# Altium PCB main.PcbDoc
Units mil, origin at the board's own origin, x right, y up, seen from the top; angles counter-clockwise.
Board outline 6000 x 4000 mil, 2 copper layers (Top Layer, Bottom Layer); 10 components, 13 nets, 109 pads, 11 vias.
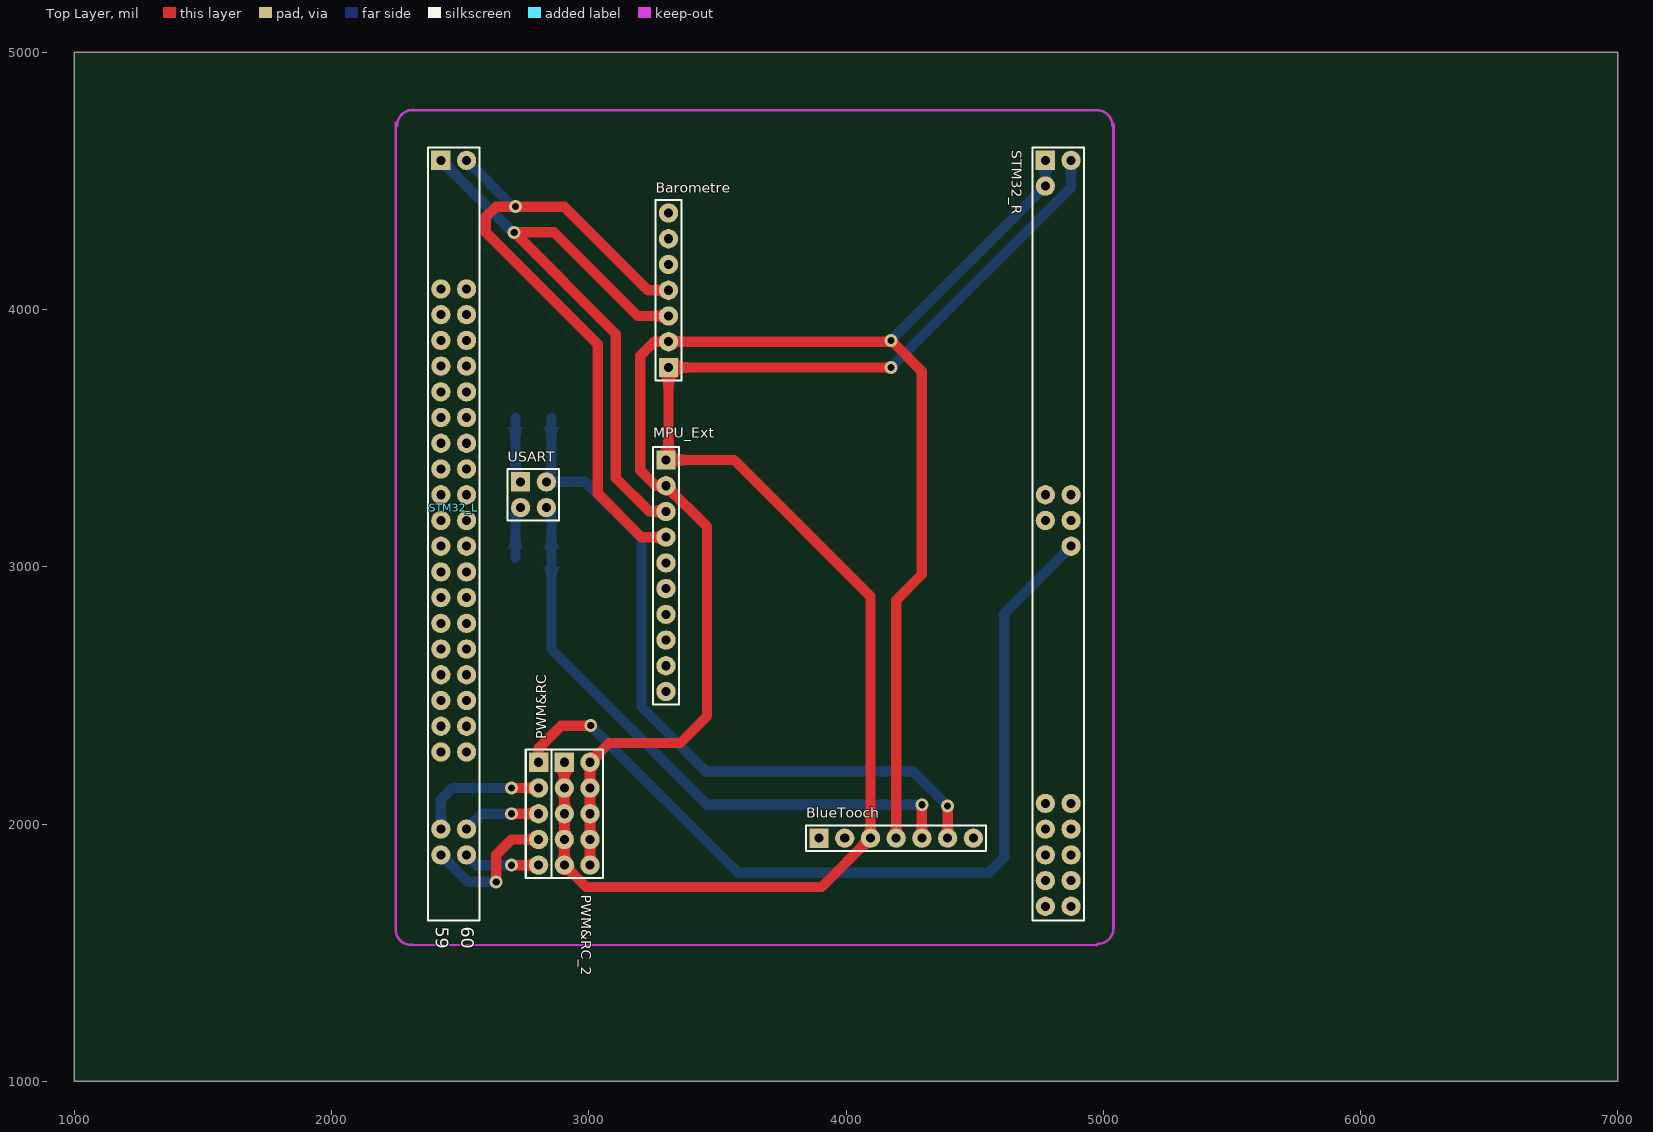
[diagram p0: Top Layer view]
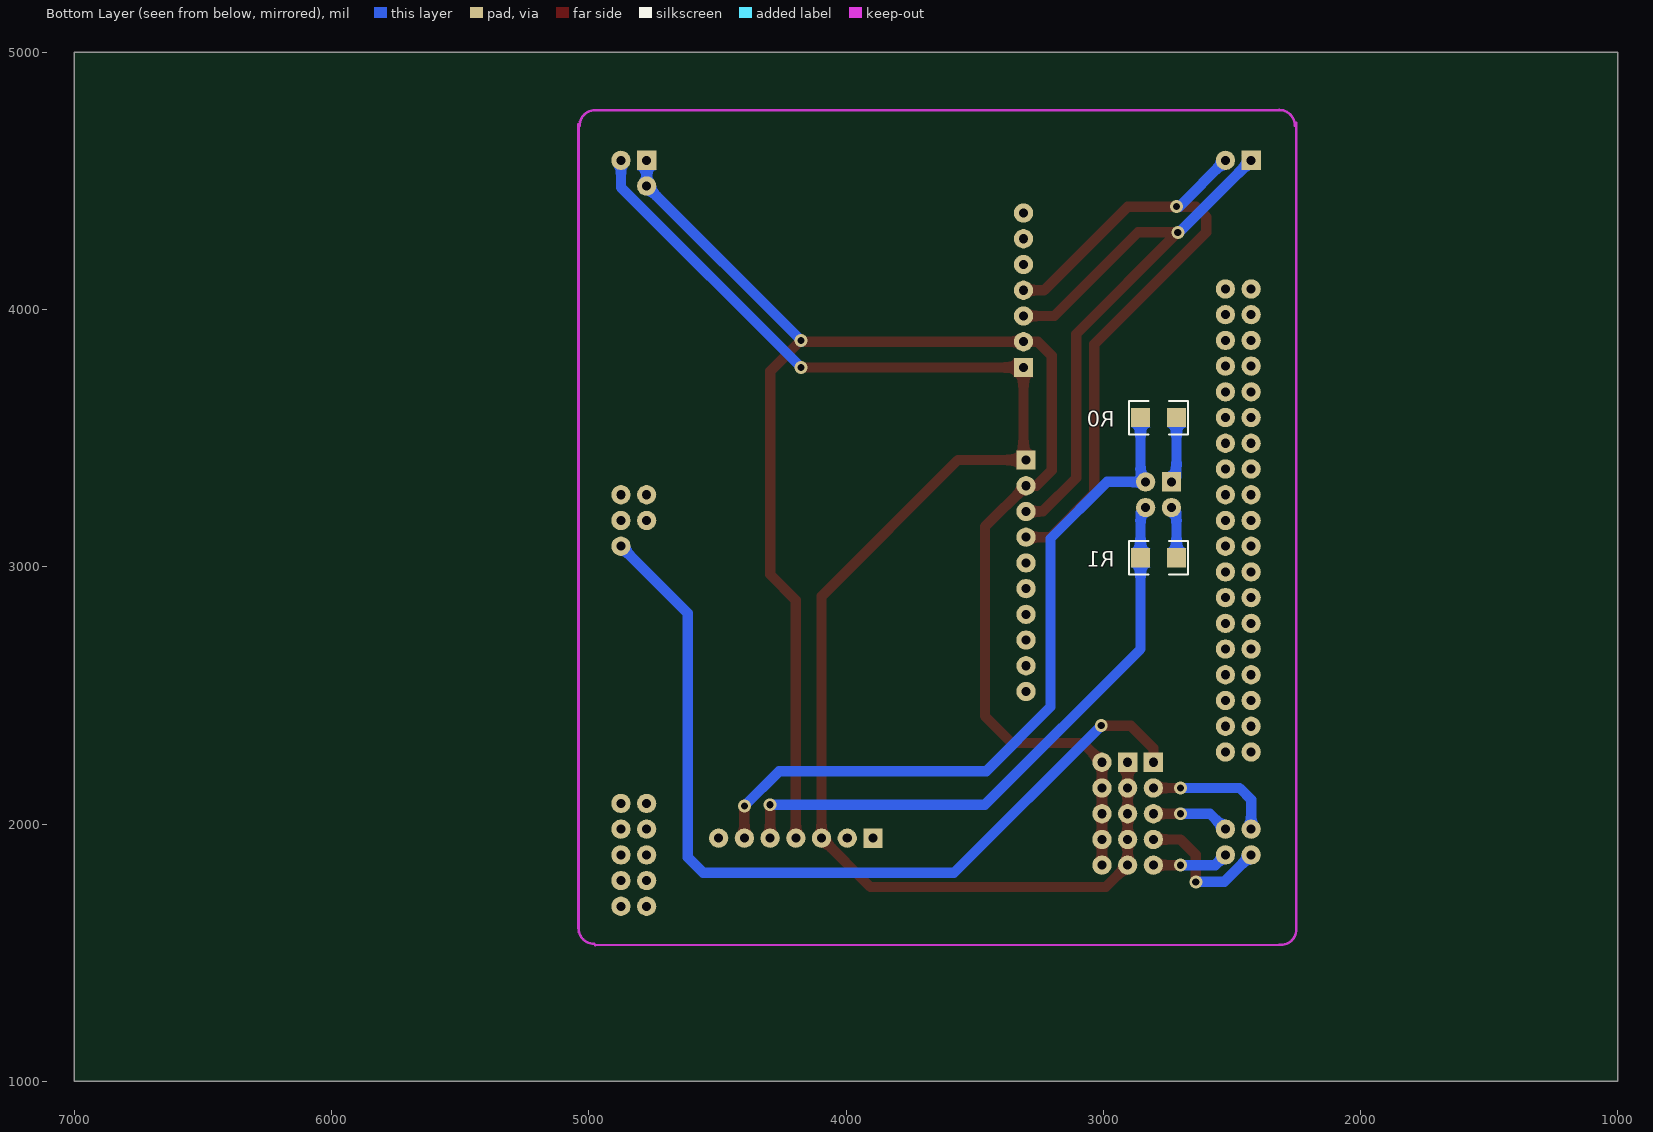
[diagram p1: Bottom Layer view, seen from below]

## Layer stack, top to bottom
Top Solder: solder mask 0.4, Solder Resist, Dk 3.5
Top Layer: signal copper 1.4
Dielectric 1: dielectric 12.6, FR-4, Dk 4.8
Bottom Layer: signal copper 1.4
Bottom Solder: solder mask 0.4, Solder Resist, Dk 3.5

## Board outline
1000,1000 7000,1000 7000,5000 1000,5000

## Design rules (kind name [scope] priority, off if disabled: settings)
Clearance [All] p1: gap=10 ignorepadtopadclearanceinfootprint=FALSE except(0: Arc-Hole Track-Hole SMDPad-Hole THPad-Hole Via-Hole Fill-Hole Poly-Hole Region-Hole Text-Hole)
PolygonConnect [All] p1: connectstyle=Relief reliefconductorwidth=10 reliefentries=4 polygonreliefangle="90 Angle" airgapwidth=10
RoutingVias [All] p1: holewidth=28 width=50 viastyle="Through Hole" minholewidth=28 minwidth=50 maxholewidth=28 maxwidth=50
SolderMaskExpansion [All] p1: expansion=4
Width [All] p1: maxlimit=50 minlimit=38 preferedwidth=40
30 further rules are at their usual default settings.

## Classes and differential pairs
component class main: Barometre BlueTooch MPU_Ext PWM&RC PWM&RC_2 R0 R1 STM32_R USART

## Components (designator, comment, footprint, x,y, rotation, side; value= is the part's Value field where it differs from the comment)
Barometre "Header 7" HDR1X7 3310,3775 r90 top
BlueTooch "Header 7" HDR1X7 3895,1945 r0 top
MPU_Ext "Header 10" HDR1X10 3300,3415 r270 top
PWM&RC "Header 5" HDR1X5 2805,2240 r270 top
PWM&RC_2 "Header 5X2" HDR2X5 2905,2240 r270 top
R0 "Res2" 1210 2785,3580 r0 bottom value=0R
R1 "Res2" 1210 2785,3035 r0 bottom value=0R
STM32_L "Header 30X2" HDR2X30#1 2425,4580 r270 top
STM32_R "Header 30X2" HDR2X30#2 4775,4580 r270 top
USART "Header 2X2" HDR2X2 2735,3330 r270 top

## Footprints (in the part's own frame and the unit in brackets; to place one, negate y for a bottom-side part, rotate by r counter-clockwise, add the part's x,y. Pads: shape width x height; smd on the part's side, far side on the other; paste and mask are expansions set on the pad)
1210 [mil] "贴片元件"
  rect 75x75 smd: 1(-70,0) 2(70,0)
  silkscreen extent -115,-65 115,65, body extent -65,-50 65,50, height 39
HDR1X5 [mm] "Connector; Header; 5 Position"
  rect 1.905x1.905 hole 0.9: 1(0,0)
  round 1.905 hole 0.9: 2(2.54,0) 3(5.08,0) 4(7.62,0) 5(10.16,0)
  silkscreen extent -1.27,-1.27 11.43,1.27
HDR1X7 [mm] "Connector; Header; 7 Position"
  rect 1.905x1.905 hole 0.9: 1(0,0)
  round 1.905 hole 0.9: 2(2.54,0) 3(5.08,0) 4(7.62,0) 5(10.16,0) 6(12.7,0) 7(15.24,0)
  silkscreen extent -1.27,-1.27 16.51,1.27
HDR1X10 [mm] "Connector; Header; 10 Position"
  rect 1.905x1.905 hole 0.9: 1(0,0)
  round 1.905 hole 0.9: 2(2.54,0) 3(5.08,0) 4(7.62,0) 5(10.16,0) 6(12.7,0) 7(15.24,0) 8(17.78,0) 9(20.32,0) 10(22.86,0)
  silkscreen extent -1.27,-1.27 24.13,1.27
HDR2X2 [mm] "Connector; Header; 2x2 Position"
  rect 1.905x1.905 hole 0.9: 1(0,0)
  round 1.905 hole 0.9: 2(0,2.54) 3(2.54,0) 4(2.54,2.54)
  silkscreen extent -1.27,-1.27 3.81,3.81
HDR2X5 [mm] "Connector; Header; 5x2 Position"
  rect 1.905x1.905 hole 0.9: 1(0,0)
  round 1.905 hole 0.9: 2(0,2.54) 3(2.54,0) 4(2.54,2.54) 5(5.08,0) 6(5.08,2.54) 7(7.62,0) 8(7.62,2.54) 9(10.16,0) 10(10.16,2.54)
  silkscreen extent -1.27,-1.27 11.43,3.81
HDR2X30#1 [mm] "Connector; Header; 30x2 Position"
  rect 1.905x1.905 hole 0.9: 1(0,0)
  round 1.905 hole 0.9: 2(0,2.54) 11(12.7,0) 12(12.7,2.54) 13(15.24,0) 14(15.24,2.54) 15(17.78,0) 16(17.78,2.54) 17(20.32,0) 18(20.32,2.54) 19(22.86,0) 20(22.86,2.54) 21(25.4,0) 22(25.4,2.54) 23(27.94,0) 24(27.94,2.54) 25(30.48,0) 26(30.48,2.54) 27(33.02,0) 28(33.02,2.54) 29(35.56,0) 30(35.56,2.54) 31(38.1,0) 32(38.1,2.54) 33(40.64,0) 34(40.64,2.54) 35(43.18,0) 36(43.18,2.54) 37(45.72,0) 38(45.72,2.54) 39(48.26,0) 40(48.26,2.54) 41(50.8,0) 42(50.8,2.54) 43(53.34,0) 44(53.34,2.54) 45(55.88,0) 46(55.88,2.54) 47(58.42,0) 48(58.42,2.54) 53(66.04,0) 54(66.04,2.54) 55(68.58,0) 56(68.58,2.54)
  silkscreen extent -1.27,-1.27 75.06,3.81
HDR2X30#2 [mm] "Connector; Header; 30x2 Position"
  rect 1.905x1.905 hole 0.9: 1(0,0)
  round 1.905 hole 0.9: 2(0,2.54) 3(2.54,0) 27(33.02,0) 28(33.02,2.54) 29(35.56,0) 30(35.56,2.54) 32(38.1,2.54) 51(63.5,0) 52(63.5,2.54) 53(66.04,0) 54(66.04,2.54) 55(68.58,0) 56(68.58,2.54) 57(71.12,0) 58(71.12,2.54) 59(73.66,0) 60(73.66,2.54)
  silkscreen extent -1.27,-1.27 75.06,3.81

## Part data
Barometre BlueTooch: "Header, 7-Pin", LatestRevisionDate=17-Jul-2002, LatestRevisionNote="Re-released for DXP Platform.", Publisher="Altium Limited"
MPU_Ext: "Header, 10-Pin", LatestRevisionDate=17-Jul-2002, LatestRevisionNote="Re-released for DXP Platform.", Publisher="Altium Limited"
PWM&RC: "Header, 5-Pin", LatestRevisionDate=17-Jul-2002, LatestRevisionNote="Re-released for DXP Platform.", Publisher="Altium Limited"
PWM&RC_2: "Header, 5-Pin, Dual row", LatestRevisionDate=17-Jul-2002, LatestRevisionNote="Re-released for DXP Platform.", Publisher="Altium Limited"
R0 R1: "Resistor", LatestRevisionDate=17-Jul-2002, LatestRevisionNote="Re-released for DXP Platform.", PackageDescription="Axial Device, Thru-Hole; 2 Leads; 0.4 in Pin Spacing", PackageReference=AXIAL-0.4, Published=8-Jun-2000, Publisher="Altium Limited"
STM32_L STM32_R: "Header, 30-Pin, Dual row", LatestRevisionDate=17-Jul-2002, LatestRevisionNote="Re-released for DXP Platform.", Publisher="Altium Limited"
USART: "Header, 2-Pin, Dual row", LatestRevisionDate=17-Jul-2002, LatestRevisionNote="Re-released for DXP Platform.", Publisher="Altium Limited"

## Via types
v1: diameter 50, hole 28, Top Layer to Bottom Layer, 11 vias

## Nets (pads, with @x,y where several pads share a name; then routed paths per layer and width w, separated by ;. In a path a pad name is that pad's centre, name@x,y a point inside that pad or via, vN(x,y) a via of type N, cw(c..) or ccw(c..) an arc to the next point about the centre after c; other vN are vias at no path point)
A6_PPM_IN: PWM&RC.1 STM32_R.32 | length 3480.9
  Top Layer w40: PWM&RC.1 2805,2295 2892.5,2382.5 v1(3007.5,2382.5)
  Bottom Layer w40: v1(3007.5,2382.5) 3580,1810 4555,1810 4615,1870 4615,2820 STM32_R.32
A9_TX: BlueTooch.6 R0.2 USART.2 | length 2853.9
  Top Layer w40: BlueTooch.6 v1@4395,2075
  Bottom Layer w40: R0.2 2855,3350 USART.2 2985,3330 3205,3110 3205,2455 3455,2205 4260,2205 v1(4395,2070)
A10_RX: BlueTooch.5 R1.2 USART.4 | length 2378.9
  Top Layer w40: BlueTooch.5 v1(4295,2075)
  Bottom Layer w40: USART.4 2855,3210 R1.2 2855,2680 3460,2075 v1(4295,2075)
B6_MOTOR1: PWM&RC.2 STM32_L.53 | length 513.6
  Top Layer w40: v1(2700,2140) PWM&RC.2
  Bottom Layer w40: STM32_L.53 2425,2095 2470,2140 v1(2700,2140)
B7_MOTOR2: PWM&RC.3 STM32_L.54 | length 304.9
  Top Layer w40: v1(2700,2040) PWM&RC.3
  Bottom Layer w40: STM32_L.54 2585,2040 v1(2700,2040)
B8_MOTOR3: PWM&RC.4 STM32_L.55 | length 560.4
  Top Layer w40: v1(2640,1775) 2640,1880 2700,1940 PWM&RC.4 PWM&RC.4@2800,1945
  Bottom Layer w40: STM32_L.55 2530,1775 v1(2640,1775)
B9_MOTOR4: PWM&RC.5 STM32_L.56 | length 296.6
  Top Layer w40: v1(2700,1840) PWM&RC.5
  Bottom Layer w40: STM32_L.56 2565,1840 v1(2700,1840)
B12_SCL: Barometre.3 MPU_Ext.3 STM32_L.1 | length 2491
  Top Layer w40: MPU_Ext.3 3235,3215 3105,3345 3105,3905 v1(2710,4300) 2865,4300 3190,3975 Barometre.3
  Bottom Layer w40: STM32_L.1 v1@2700,4305
B13_SDA: Barometre.4 MPU_Ext.4 STM32_L.2 | length 2706.3
  Top Layer w40: MPU_Ext.4 3205,3115 3035,3285 3035,3865 2600,4300 2600,4360 2640,4400 v1(2715,4400) 2905,4400 3230,4075 Barometre.4
  Bottom Layer w40: STM32_L.2 v1@2705,4400
CH340_RX: R0.1 USART.1 | length 258.3
  Bottom Layer w40: R0.1 2715,3350 USART.1
CH340_TX: R1.1 USART.3 | length 203.3
  Bottom Layer w40: R1.1 2715,3210 USART.3
GND: Barometre.2 BlueTooch.4 MPU_Ext.2 PWM&RC_2.2 PWM&RC_2.4 PWM&RC_2.6 PWM&RC_2.8 PWM&RC_2.10 STM32_R.1 STM32_R.3 | length 6440.2
  Top Layer w40: PWM&RC_2.10 PWM&RC_2.8 PWM&RC_2.6 PWM&RC_2.4 PWM&RC_2.2 3080,2315 3355,2315 3460,2420 3460,3155 MPU_Ext.2 3260,3315 3200,3375 3200,3820 3255,3875 Barometre.2 4170,3875 v1(4175,3880) 4295,3760 4295,2970 4195,2870 BlueTooch.4
  Bottom Layer w40: v1@4175,3875 v1(4175,3880) STM32_R.3 STM32_R.1
VCC: Barometre.1 BlueTooch.3 MPU_Ext.1 PWM&RC_2.1 PWM&RC_2.3 PWM&RC_2.5 PWM&RC_2.7 PWM&RC_2.9 STM32_R.2 | length 5982.5
  Top Layer w40: PWM&RC_2.1 PWM&RC_2.3 PWM&RC_2.5 PWM&RC_2.7 PWM&RC_2.9 2990,1755 3905,1755 BlueTooch.3 4095,2885 3565,3415 MPU_Ext.1 3310,3425 Barometre.1 v1(4175,3775)
  Bottom Layer w40: v1(4175,3775) 4875,4475 STM32_R.2
pads on no net: Barometre.5 Barometre.6 Barometre.7 BlueTooch.1 BlueTooch.2 BlueTooch.7 MPU_Ext.5 MPU_Ext.6 MPU_Ext.7 MPU_Ext.8 MPU_Ext.9 MPU_Ext.10 STM32_L.11 STM32_L.12 STM32_L.13 STM32_L.14 STM32_L.15 STM32_L.16 STM32_L.17 STM32_L.18 STM32_L.19 STM32_L.20 STM32_L.21 STM32_L.22 STM32_L.23 STM32_L.24 STM32_L.25 STM32_L.26 STM32_L.27 STM32_L.28 STM32_L.29 STM32_L.30 STM32_L.31 STM32_L.32 STM32_L.33 STM32_L.34 STM32_L.35 STM32_L.36 STM32_L.37 STM32_L.38 STM32_L.39 STM32_L.40 STM32_L.41 STM32_L.42 STM32_L.43 STM32_L.44 STM32_L.45 STM32_L.46 STM32_L.47 STM32_L.48 STM32_R.27 STM32_R.28 STM32_R.29 STM32_R.30 STM32_R.51 STM32_R.52 STM32_R.53 STM32_R.54 STM32_R.55 STM32_R.56 STM32_R.57 STM32_R.58 STM32_R.59 STM32_R.60

## Keep-outs
Keep-Out Layer:
  lines w10: 2248.97,1591.03 ccw(c2310,1591.03) 2310,1530 ; 2250,1591.03 2250,4725 ; 2255,4715 cw(c2316.03,4715) 2316.03,4776.03 ; 2310,4775 4970,4775 ; 2315,1530 4973.97,1528.97 ; 4975,4775 cw(c4975,4713.97) 5036.03,4713.97 ; 4978.97,1533.97 ccw(c4978.97,1595) 5040,1595 5040,4720

## Text inside footprints (layer, text, board x,y; h text height)
STM32_L: Bottom Overlay "1" at 2405,6780 h50 r270; Top Overlay "59" at 2405,1600 h50 r270; Top Overlay "60" at 2505,1600 h50 r270
STM32_R: Bottom Overlay "1" at 4755,6780 h50 r270